# Altium PCB BLE-NTC.PcbDoc
Units mm, origin at the board's own origin, x right, y up, seen from the top; angles counter-clockwise.
Board outline 37.19 x 67.35 mm, 2 copper layers (Top Layer, Bottom Layer), stack 1.571 mm thick; 30 components, 20 nets, 147 pads, 37 vias.
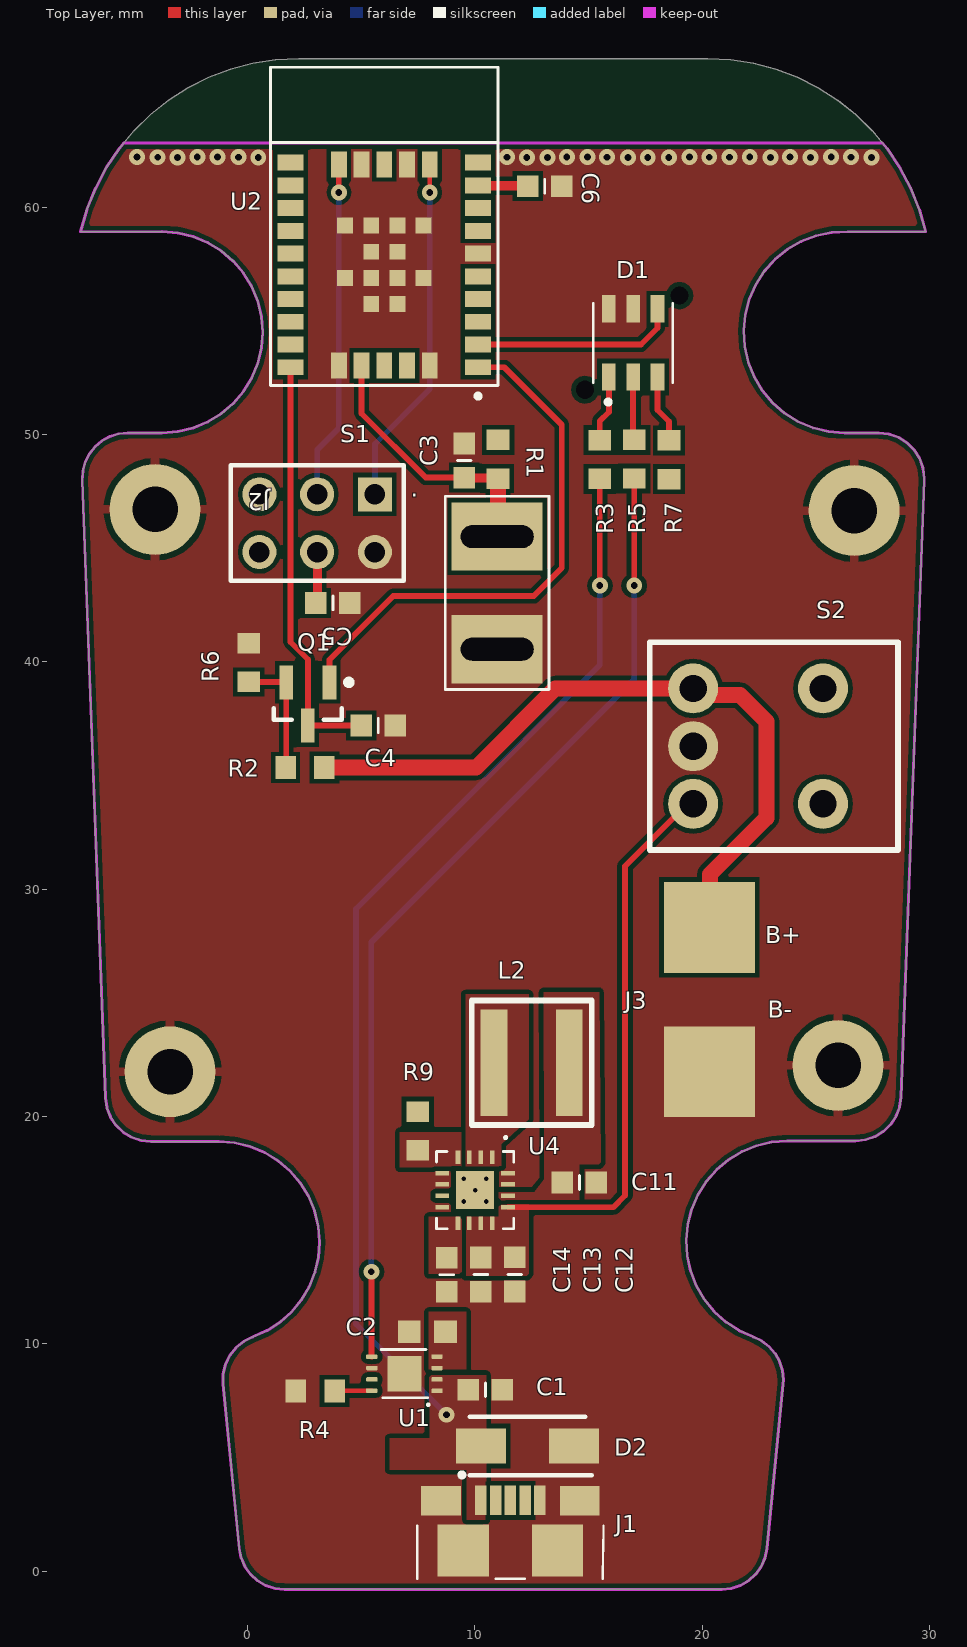
[diagram p0: Top Layer view]
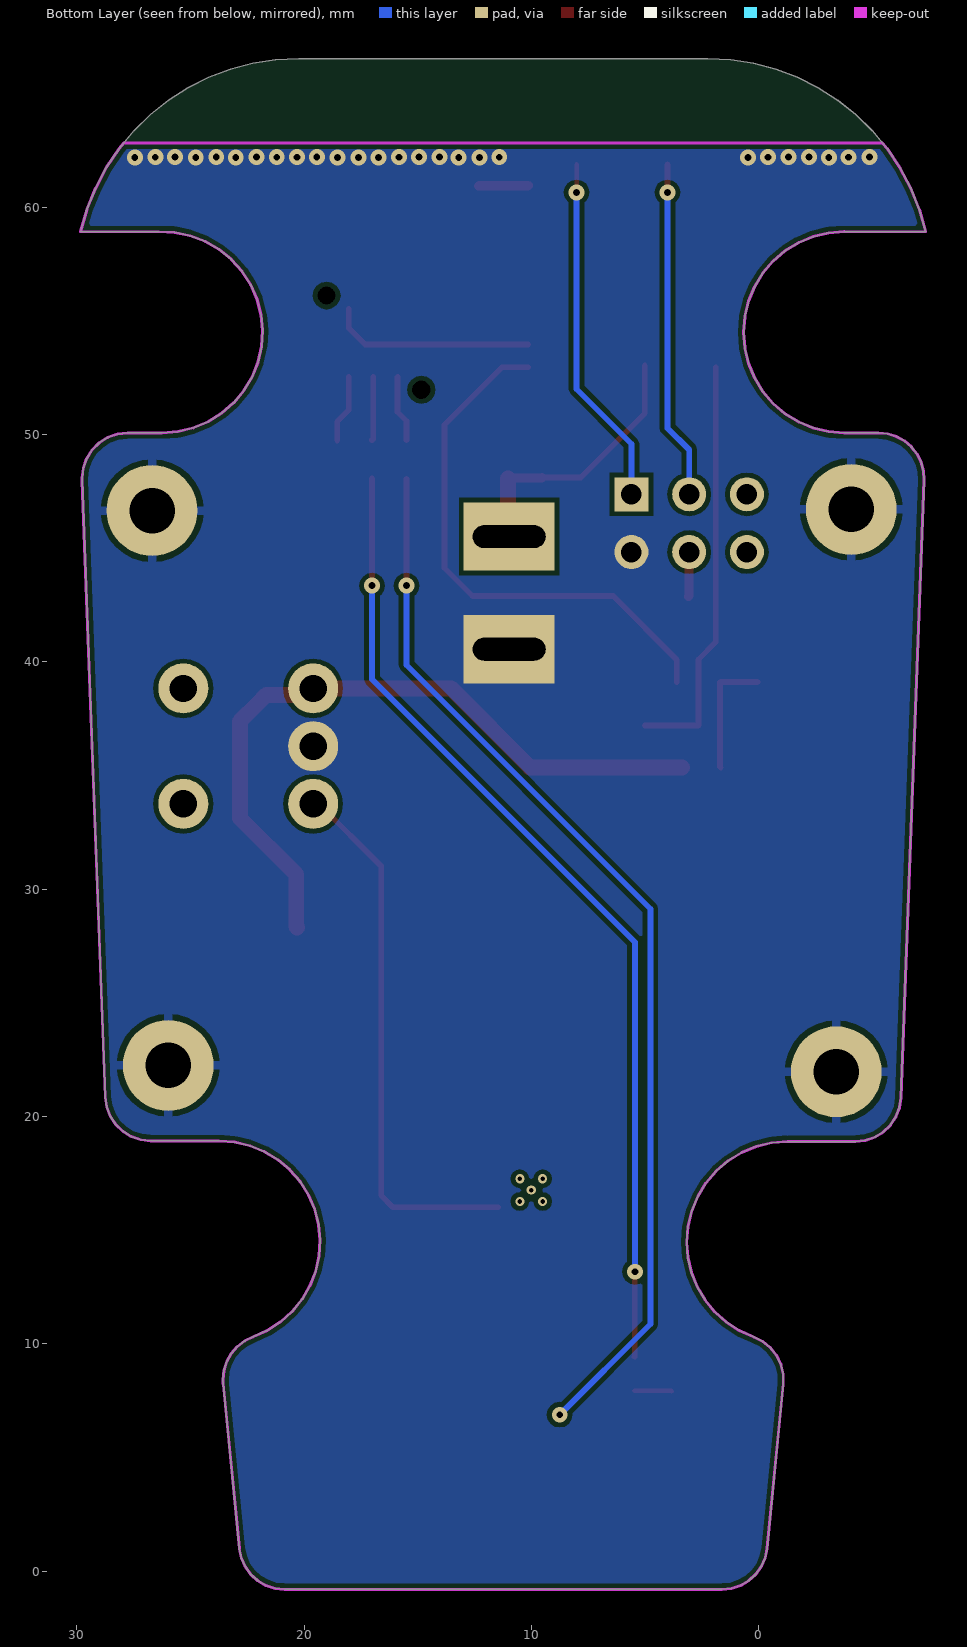
[diagram p1: Bottom Layer view, seen from below]
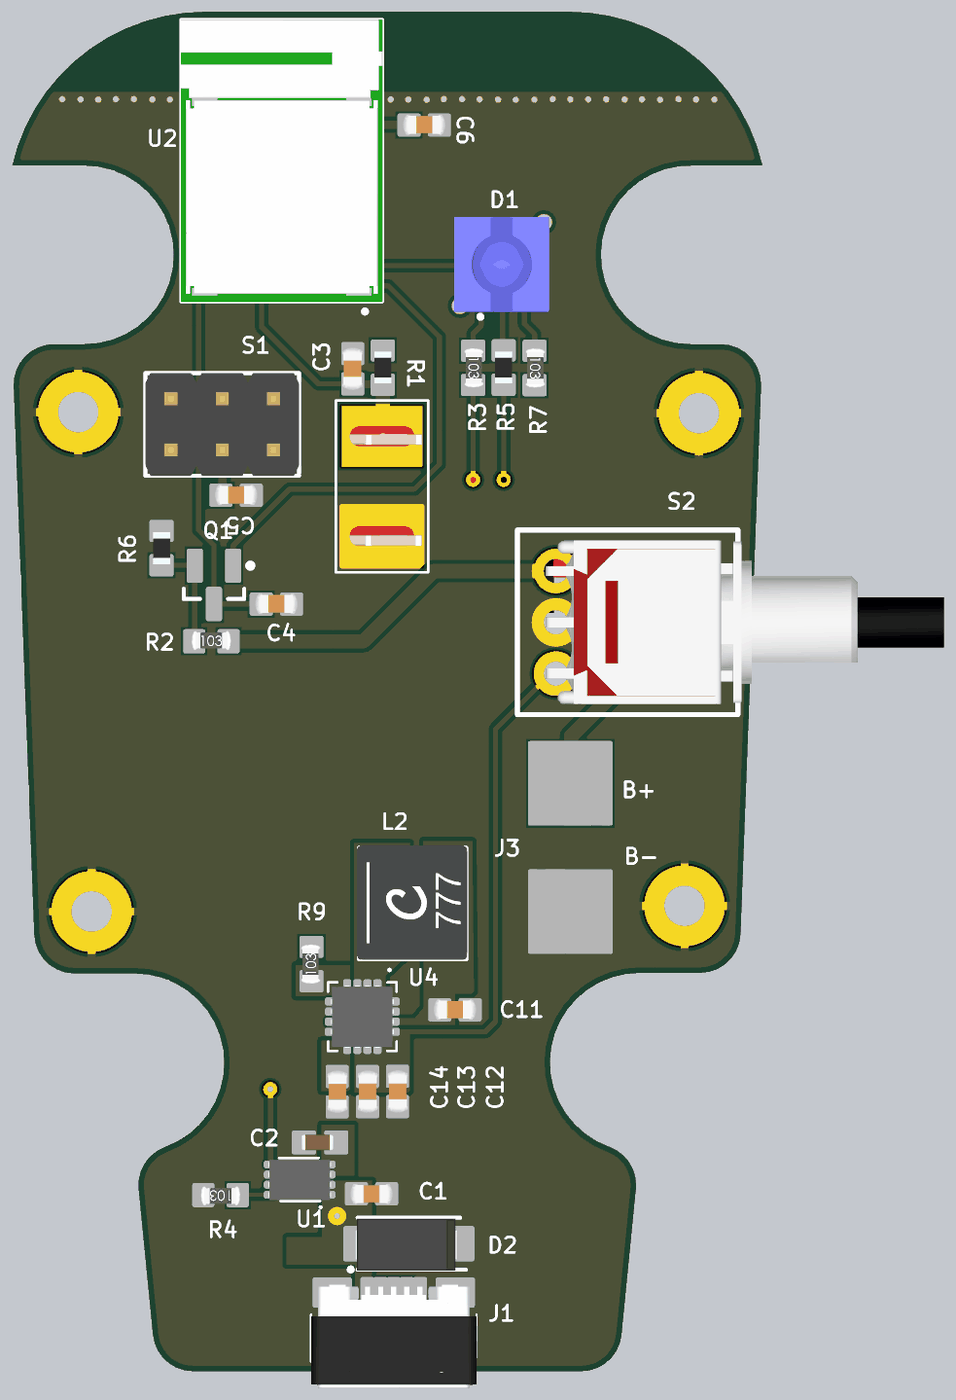
[diagram p2: 3D render of the assembled board from above, using the file's embedded part models]

## Layer stack, top to bottom
Top Solder: solder mask 0.0102, Solder Resist, Dk 3.5
Top Layer: signal copper 0.0356
Dielectric 1: dielectric 1.5, FR-4, Dk 4.8
Bottom Layer: signal copper 0.0356
Bottom Solder: solder mask 0.0102, Solder Resist, Dk 3.5

## Board outline
-3.753,50.079 -5.266,50.079 -5.665,50.039 -6.048,49.919 -6.4,49.726 -6.706,49.466 -6.954,49.151 -7.134,48.792 -7.239,48.405 -7.264,48.004 -6.247,20.827 -6.183,20.394 -6.026,19.986 -5.785,19.622 -5.47,19.318 -5.096,19.091 -4.683,18.95 -4.248,18.902 -1.252,18.902 -0.56,18.847 0.116,18.685 0.757,18.419 1.35,18.056 1.878,17.605 2.329,17.077 2.692,16.485 2.957,15.843 3.12,15.168 3.174,14.476 3.122,13.8 2.968,13.14 2.714,12.511 2.368,11.929 1.936,11.406 1.43,10.955 0.861,10.587 0.242,10.31 -0.154,10.116 -0.497,9.841 -0.773,9.497 -0.966,9.101 -1.068,8.672 -1.073,8.231 -0.362,0.999 -0.277,0.588 -0.108,0.203 0.137,-0.138 0.449,-0.42 0.812,-0.631 1.211,-0.761 1.629,-0.805 20.867,-0.805 21.285,-0.761 21.684,-0.631 22.048,-0.42 22.359,-0.138 22.604,0.203 22.773,0.588 22.858,0.999 23.569,8.23 23.579,8.426 23.537,8.832 23.414,9.222 23.214,9.578 22.946,9.886 22.621,10.133 22.252,10.309 21.623,10.591 21.045,10.967 20.532,11.428 20.097,11.963 19.75,12.559 19.499,13.201 19.351,13.874 19.308,14.563 19.373,15.249 19.543,15.917 19.815,16.551 20.182,17.135 20.634,17.655 21.162,18.099 21.752,18.456 22.39,18.718 23.061,18.877 23.748,18.93 26.759,18.93 27.193,18.978 27.607,19.119 27.98,19.347 28.295,19.65 28.537,20.015 28.693,20.423 28.757,20.856 29.775,48.004 29.776,48.079 29.726,48.524 29.578,48.946 29.34,49.326 29.023,49.642 28.644,49.881 28.221,50.028 27.776,50.079 26.263,50.079 25.563,50.134 24.881,50.3 24.234,50.571 23.638,50.941 23.107,51.401 22.656,51.939 22.296,52.541 22.036,53.193 21.881,53.877 21.837,54.578 21.905,55.276 22.081,55.956 22.363,56.598 22.743,57.188 23.212,57.711 23.757,58.153 24.365,58.503 25.021,58.753 25.708,58.896 26.409,58.928 29.845,58.928 29.564,59.905 29.184,60.848 28.708,61.747 28.142,62.592 27.493,63.374 26.766,64.085 25.97,64.717 25.112,65.264 24.203,65.72 23.252,66.079 22.269,66.339 21.265,66.496 20.249,66.548 2.254,66.548 1.238,66.496 0.234,66.339 -0.75,66.079 -1.701,65.72 -2.61,65.264 -3.467,64.717 -4.263,64.085 -4.99,63.374 -5.639,62.592 -6.205,61.747 -6.681,60.848 -7.061,59.905 -7.342,58.928 -3.906,58.928 -3.753,58.931 -3.061,58.876 -2.386,58.714 -1.744,58.448 -1.152,58.085 -0.624,57.634 -0.173,57.106 0.19,56.514 0.456,55.872 0.618,55.197 0.673,54.505 0.618,53.812 0.456,53.137 0.19,52.495 -0.173,51.903 -0.624,51.375 -1.152,50.924 -1.744,50.561 -2.386,50.295 -3.061,50.133

## Design rules (kind name [scope] priority, off if disabled: settings)
BoardOutlineClearance [All] p1: gap=0.1 ignorepadtopadclearanceinfootprint=FALSE except(0.25: Arc-OutlineEdge Arc-CutoutEdge)
Clearance [All] p1: gap=0.2 ignorepadtopadclearanceinfootprint=TRUE
HoleSize [All] p1: absolutevalues=TRUE maxlimit=5 minlimit=0.025 maxpercent=80.000 minpercent=20.000
MinimumAnnularRing [All] p1: minimumring=0.1
MinimumSolderMaskSliver [All] p1: minsoldermaskwidth=0.1
PasteMaskExpansion [All] p1: expansion=0.1
PlaneConnect [All] p1: planeconnectstyle=Direct reliefexpansion=0.508 reliefentries=4 reliefconductorwidth=0.254 reliefairgap=0.254
PolygonConnect [All] p1: connectstyle=Direct reliefconductorwidth=0.254 reliefentries=4 polygonreliefangle="90 Angle" airgapwidth=0.254
RoutingVias [All] p1: holewidth=0.3 width=0.7 viastyle="Through Hole" minholewidth=0.2 minwidth=0.4 maxholewidth=0.3 maxwidth=0.7
SilkToSolderMaskClearance [IsPad] p1: minsilkscreentomaskgap=0.2 clearancetoexposedcopper=TRUE
SolderMaskExpansion [All] p1: expansion=0.1 istentingtop=FALSE
Width [All] p1: maxlimit=1 minlimit=0.2 preferedwidth=0.254
25 further rules are at their usual default settings.

## Components (designator, comment, footprint, x,y, rotation, side; value= is the part's Value field where it differs from the comment)
C1 "Capacitor" CAPC1608N#1 10.469,7.987 r0 top
C2 "Capacitor" CAPC1608N#2 7.92,10.531 r180 top
C3 "Capacitor" CAPC1608N#1 9.541,48.86 r270 top
C4 "Capacitor" CAPC1608N#1 5.756,37.204 r180 top
C5 "Capacitor" CAPC1608N#1 3.759,42.596 r180 top
C6 "Capacitor" CAPC1608N#1 13.081,60.935 r180 top
C11 "Capacitor" CAPC1608N#1 14.605,17.1 r180 top
C12 "Capacitor" CAPC1608N#1 11.757,13.056 r90 top
C13 "Capacitor" CAPC1608N#1 10.272,13.049 r90 top
C14 "Capacitor" CAPC1608N#1 8.767,13.043 r90 top
D1 "Red & Green & Blue, 120deg" 150353M153300 15.892,52.535 r90 top
D2 "SMA6J5.0CA-TR" SMA6J5.0CA-TR 12.319,5.512 r180 top
J1 "GMCBA058211230HHR" GMCBA058211230HHR 11.569,0.808 r0 top
J2 "61300621121" HDR2X3 5.608,47.376 r180 top
J3 "BAT_PAD" BAT_PAD 18.293,24.13 r270 top
L2 "XAL5030-222MEB" 22uh-XAL5030 12.508,22.369 r0 top
Q1 "NX3008NBK" SOT23-3N 2.661,38.154 r270 top
R1 "Resistor" RESC1608N 11.03,48.919 r90 top
R2 "Resistor" RESC1608N 2.532,35.357 r0 top
R3 "Resistor" RESC1608N 15.503,48.905 r270 top
R4 "Resistor" RESC1608N 2.985,7.925 r180 top
R5 "Resistor" RESC1608N 17.018,48.92 r270 top
R6 "Resistor" RESC1608N 0.062,39.972 r90 top
R7 "Resistor" RESC1608N 18.551,48.897 r270 top
R9 "Resistor" RESC1608N 7.493,19.368 r90 top
S1 "T7335" T7335D 10.988,45.514 r270 top locked
S2 "800CSP1B6M6QE" 800CSP1B6M6QE 22.149,36.297 r270 top
U1 "MCP73831T-2ACI/MC" mcp-SON50P300X200X100-9N-D 4.227,11.158 r180 top
U2 "NINA-B112-00B-00" NINAB112 10.147,52.966 r270 top
U4 "TPS62132RGTR" tps62132 10.054,16.781 r270 top

## Footprints (in the part's own frame and the unit in brackets; to place one, negate y for a bottom-side part, rotate by r counter-clockwise, add the part's x,y. Pads: shape width x height; smd on the part's side, far side on the other; paste and mask are expansions set on the pad)
22uh-XAL5030 [mm]
  rect 1.18x4.7 smd: 1(-1.655,0) 2(1.655,0)
  silkscreen extent -2.64,-2.74 2.64,2.74, body extent -2.77,-2.8 2.71,2.88, height 3
800CSP1B6M6QE [mm]
  round 2.2 hole 1.2: 1(2.54,-2.54) 2(0,-2.54) 3(-2.54,-2.54) ""(-2.54,3.175) ""(2.54,3.175)
  silkscreen extent -4.57,-4.45 4.57,6.48, body extent -4.05,-3.04 4.05,16.69, height 6.35
150353M153300 [mm]
  rect 1.2x0.6 smd: 1(0,0) 2(3,0) 3(0,-1.075) 4(3,-1.075) 5(0,-2.15) 6(3,-2.15)
  round 0 hole 0.8: 8(-0.559,1.041) 8(3.581,-3.124)
  silkscreen extent -1.2,-2.82 3.26,0.67, body extent -0.85,-3.38 3.85,1.32, height 8.89
BAT_PAD [mm]
  rect 4x4 smd mask+0.05: BAT+(-4.191,2.032) BAT-(2.159,2.032)
CAPC1608N#1 [mm]
  rrect0% 0.95x0.95 smd: 1(-0.75,0) 2(0.75,0)
  silkscreen extent 0,-0.3 0,0.3, body extent -1.05,-0.53 1.05,0.5, height 0.81
CAPC1608N#2 [mm] "Chip Capacitor, Body 1.6x0.8mm, IPC Medium Density"
  rect 1x1 smd: 1(-0.8,0) 2(0.8,0)
  body extent -0.67,-0.4 0.93,0.4, height 0.9
GMCBA058211230HHR [mm]
  rect 0.5x1.3 smd: 1(-1.3,2.304) 2(-0.65,2.304) 3(0,2.304) 4(0.65,2.304) 5(1.3,2.304)
  rect 1.75x1.3 smd: 6(-3.048,2.286) 7(3.048,2.286)
  rect 2.25x2.3 smd: 8(-2.075,0.1) 9(2.075,0.1)
  silkscreen extent -4.1,-1.14 4.1,3.53, body extent -4.1,-2.43 4.1,2.67, height 3.77
HDR2X3 [mm] "Connector; Header; 3x2 Position"
  rect 1.5x1.5 hole 0.9: 1(0,0)
  round 1.5 hole 0.9: 2(0,2.54) 3(2.54,0) 4(2.54,2.54) 5(5.08,0) 6(5.08,2.54)
  silkscreen extent -1.27,-1.27 6.35,3.81, body extent -1.27,-1.27 6.35,3.81, height 8.67
mcp-SON50P300X200X100-9N-D [mm]
  rrect50% 0.5x0.2 smd: 1(-4.116,3.221) 2(-4.116,2.721) 3(-4.116,2.221) 4(-4.116,1.721) 5(-1.246,1.721) 6(-1.246,2.221) 7(-1.246,2.721) 8(-1.246,3.221)
  rect 1.5x1.55 smd: 9(-2.681,2.471)
  silkscreen extent -3.77,1.4 -1.66,3.89, body extent -4.23,1.47 -1.13,3.47, height 1
NINAB112 [mm]
  rect 0.7x1.15 smd: 1(0,0) 2(-1,0) 3(-2,0) 4(-3,0) 5(-4,0) 6(-5,0) 7(-6,0) 8(-7,0) 9(-8,0) 10(-9,0) 16(-9,-8.25) 17(-8,-8.25) 18(-7,-8.25) 19(-6,-8.25) 20(-5,-8.25) 21(-4,-8.25) 22(-3,-8.25) 23(-2,-8.25) 24(-1,-8.25) 25(0,-8.25)
  rect 1.15x0.7 smd: 11(-8.925,-2.125) 12(-8.925,-3.125) 13(-8.925,-4.125) 14(-8.925,-5.125) 15(-8.925,-6.125) 26(-0.075,-6.125) 27(-0.075,-5.125) 28(-0.075,-4.125) 29(-0.075,-3.125) 30(-0.075,-2.125)
  rect 0.7x0.7 smd: 31(-2.78,-3.55) 32(-3.93,-2.4) 33(-3.93,-3.55) 34(-3.93,-4.7) 35(-3.93,-5.85) 36(-5.08,-3.55) 37(-5.08,-4.7) 38(-6.23,-2.4) 39(-6.23,-3.55) 40(-6.23,-4.7) 41(-6.23,-5.85) 42(-2.78,-4.7)
  silkscreen extent -13.2,-9.13 1.32,0.87, body extent -13.2,-9.13 0.8,0.88, height 3.76
RESC1608N [mm] "Chip Resistor, Body 1.6x0.8mm, IPC Medium Density"
  rect 0.9x1 smd: 1(-0.85,0) 2(0.85,0)
  body extent -0.79,-0.42 0.79,0.43, height 0.5
SMA6J5.0CA-TR [mm]
  rect 2.2x1.55 smd: 1(-2.05,0) 2(2.05,0)
  silkscreen extent -2.82,-1.29 2.54,1.29, body extent -2.41,-1.24 2.66,1.34, height 2.23
SOT23-3N [mm] "SOT23, 3-Leads, Body 2.9x1.3mm, Pitch 0.95mm, Lead Span 2.5mm, IPC Medium Density"
  rect 1.5x0.6 smd: 1(-0.95,0.95) 2(-0.95,-0.95) 3(0.95,0)
  silkscreen extent -1.07,-1.5 0.7,1.93, body extent -0.7,-1.5 0.7,1.5, height 1.1
T7335D [mm]
  rect 3x4 hole 1 slot 3.2 at 90 deg: 1(0,0) 2(4.953,0)
  silkscreen extent -1.78,-2.29 6.73,2.29, body extent -3.25,-8.03 8.75,9.17, height 5.35
tps62132 [mm]
  rrect5% 0.6x0.2 smd: 1(-1.433,0.711) 2(-1.433,0.211) 3(-1.433,-0.289) 4(-1.433,-0.789) 9(1.467,-0.789) 10(1.467,-0.289) 11(1.467,0.211) 12(1.467,0.711)
  rrect5% 0.2x0.6 smd: 5(-0.733,-1.489) 6(-0.233,-1.489) 7(0.267,-1.489) 8(0.767,-1.489) 13(0.767,1.411) 14(0.267,1.411) 15(-0.233,1.411) 16(-0.733,1.411)
  rect 1.68x1.68 smd: 17(0.017,-0.039)
  silkscreen extent -2.34,-1.74 1.72,1.66, body extent -1.53,-1.59 1.57,1.51, height 1

## Part data
C1 C2: library part CAP-000000047, Value 1=4.7uF, Value 2=16V, DES="Multilayer Ceramic Capacitors MLCC - SMD/SMT 4.7UF 16V 10% 0603", FTP=0603, MAN="Murata Electronics", MANREF=GRM188C71C475KE21D, NOTE=_, Part Number=CAP-000000047, SUP=Mouser, SUPREF=81-GRM188C71C475KE1D, TOL=10%
C3 C4: library part CAP-000000003, Value 1=10nF, Value 2=50V, DES="06035C103JAT2A -  Condensateur cÃ©ramique multicouche CMS, 10000 pF, 50 V, 0603 [1608 Metric], Â± 5%, X7R", FTP=0603, MAN=MULTICOMP, MANREF=06035C103JAT2A, NOTE=_, Part Number=CAP-000000003, SUP=Farnell, SUPREF=1833871, TOL=5%
C5 C6 C13: library part CAP-000000005, Value 1=100nF, Value 2=10V, DES="C0603X104K8RACTU -  Condensateur cÃ©ramique multicouche CMS, 0.1 ÂµF, 10 V, 0603 [1608 Metric], Â± 10%, X7R", FTP=0603, MAN=KEMET, MANREF=C0603X104K8RACTU, NOTE=_, Part Number=CAP-000000005, SUP=Farnell, SUPREF=2904937, TOL=10%
C11: library part CAP-000000045, Value 1=22uF, Value 2=6V3, DES="Multilayer Ceramic Capacitors MLCC - SMD/SMT 0603 22uF 6.3volts *Derate Voltage/Temp", FTP=0603, MAN="Murata Electronics", MANREF=GRM188R60J226MEA0D, NOTE="In Stock", Part Number=CAP-000000045, SUP=Mouser, SUPREF=81-GRM188R60J226ME0D, TOL=20%
C12: library part CAP-000000006, Value 1=10uF, Value 2=35V, DES="Multilayer Ceramic Capacitors MLCC - SMD/SMT 0603 10uF 35volts *Derate Voltage/Temp", FTP=0603, MAN="Murata Electronics", MANREF=GRM188R6YA106MA73D, NOTE=_, Part Number=CAP-000000006, SUP=Mouser, SUPREF=81-GRM188R6YA106MA3D, TOL=20%
C14: library part CAP-000000044, Value 1=430pF, Value 2=50V, DES="Multilayer Ceramic Capacitors MLCC - SMD/SMT 50V 430pF 0603 C0G 0.02", FTP=0603, MAN=KEMET, MANREF=C0603C431G5GACTU, NOTE="In Stock", Part Number=CAP-000000044, SUP=Mouser, SUPREF=80-C0603C431G5G, TOL=2%
D1: library part LED-000000004, Value 1="100 mA", Value 2=_, DES="WL-SFTW SMD Full-color TOP LED Waterclear, size 5050, Red & Green & Blue, 120deg", FTP=_, MAN="Wurth Elektronik", MANREF=150353M153300, NOTE="In Stock", Part Number=LED-000000004, SUP=Mouser, SUPREF=710-150353M153300, TOL=_
D2: library part TVS-000000006, Value 1="13.4 V", Value 2=600W, DES="ESD Suppressors / TVS Diodes HJ Temp Transil / ESD Suppressors / TVS Diodes HJ Temp Transil", FTP=SMA, MAN=STMicroelectronics, MANREF=SMA6J5.0CA-TR, NOTE="In Stock", Part Number=TVS-000000006, SUP=Mouser, SUPREF=511-SMA6J5.0CA-TR, TOL=_
J1: library part CON-000000037, Value 1=_, DES="USB Connectors USB MICRO B TYPE RECPT", FTP=SMD, MAN="Amphenol Commercial Products", MANREF=GMCBA058211230HHR, NOTE="In Stock", Part Number=CON-000000037, SUP=Mouser, SUPREF=523-GMCBA05821123HHR, TOL=_, Value 2=_
J2: library part CON-000000012, Value 1=6pts, Value 2=_, DES="Embases et logements de cÃ¢bles WR-PHD 2.54mm Hdr 6P Dual Str Gold", FTP=THT, MAN="Wurth Electronics", MANREF=61300621121, NOTE="In Stock", Part Number=CON-000000012, SUP=Mouser, SUPREF=710-61300621121, TOL=_
J3: library part MIS-000000024, Value 1=_, DES=_, FTP=_, MAN=_, MANREF=_, NOTE=_, Part Number=MIS-000000024, SUP=_, SUPREF=_, TOL=_
L2: library part IND-000000001, Value 1=2.2uH, Value 2="9.2 A", DES="Fixed Inductors 2.2uH 20% 9.7A 14.5mOhms AEC-Q200", FTP=_, MAN=Coilcraft, MANREF=XAL5030-222MEB, NOTE="In Stock", Part Number=IND-000000001, SUP=Mouser, SUPREF=994-XAL5030-222MEB, TOL="20 %"
Q1: library part TRM-000000001, Value 1=400mA, Value 2=30V, DES="NXP  NX3008NBK  MOSFET, N CH, 30V, 400MA, SOT23", FTP=SOT-23, MAN=NXP, MANREF=NX3008NBK, NOTE="In Stock", Part Number=TRM-000000001, SUP=Farnell, SUPREF=2069541, TOL=_
R1: library part RES-000000001, Value 1=10K, Value 2=0.1W, DES="YAGEO (PHYCOMP)  RC0603FR-0710KL  RESISTANCE COUCHE EPAISSE 10K 0.1W 1%", FTP=0603, MAN=YAGEO, MANREF=RC0603FR-0710KL, NOTE=_, Part Number=RES-000000001, SUP=Farnell, SUPREF=9238603, TOL=1%
R2: library part RES-00000011s3, Value 1=806K, Value 2=0.1W, DES="Thick Film Resistors 806KOHM 1/10WATT 1%", FTP=0603, MAN=Bourns, MANREF=CR0603-FX-8063ELF, NOTE="In Stock", Part Number=RES-00000011s3, SUP=Mouser, SUPREF=652-CR0603-FX8063ELF, TOL=1%
R3: library part RES-000000098, Value 1=160R, Value 2=0,1W, DES="Thick Film Resistors 1/10watt 160ohms 1%", FTP=0603, MAN="Vishay / Dale", MANREF=CRCW0603160RFKEA, NOTE="In Stock", Part Number=RES-000000098, SUP=Mouser, SUPREF=71-CRCW0603-160-E3, TOL=1%
R4: library part RES-000000009, Value 1=2K2, Value 2=0.1W, DES="YAGEO (PHYCOMP)  RC0603FR-072K2L  RESISTANCE COUCHE EPAISSE 2.2K 0.1W 1%", FTP=0603, MAN=YAGEO, MANREF=RC0603FR-072K2L, NOTE=_, Part Number=RES-000000009, SUP=Farnell, SUPREF=9238522, TOL=1%
R5 R7: library part RES-000000097, Value 1=5R1, Value 2=10W, DES="Thick Film Resistors 1/10watt 5.1ohms 5%", FTP=0603, MAN="Vishay / Dale", MANREF=CRCW06035R10JNEA, NOTE="In Stock", Part Number=RES-000000097, SUP=Mouser, SUPREF=71-CRCW0603J-5.1-E3, TOL=5%
R6: library part RES-00000011d2, Value 1="2 M", Value 2=0.125W, DES="Thin Film Resistors .1W 2Mohms 1% 0603 50ppm", FTP=0603, MAN="Vishay / Beyschlag", MANREF=MCT06030C2004FP500, NOTE="In Stock", Part Number=RES-00000011d2, SUP=Mouser, SUPREF=594-MCT06030C2004FP5, TOL=1%
R9: library part RES-000000038, Value 1=100K, Value 2=0.1W, DES="YAGEO (PHYCOMP)  RC0603FR-07100KL  RESISTANCE COUCHE EPAISSE 100K 0.1W 1%", FTP=0603, MAN=YAGEO, MANREF=RC0603FR-07100KL, NOTE=_, Part Number=RES-000000038, SUP=Farnell, SUPREF=9238727, TOL=1%
S1: library part MIS-000000023, Value 1=_, DES="Negative temperature coefficient thermistor", FTP=_, MAN=Honeywell, MANREF="T7335 D1008", NOTE=_, Part Number=MIS-000000023, SUP=_, SUPREF=_, TOL=_, Value 2=_
S2: library part SWC-000000006, Value 1=_, DES="Pushbutton Switches SPDT ON-ON PC MNT", FTP=_, MAN=E-Switch, MANREF=800CSP1B6M6QE, NOTE=_, Part Number=SWC-000000006, SUP=E-Switch, SUPREF=800CSP1B6M6QE, TOL=_, Value 2=_
U1: library part ICP-000000011, Value 1=_, DES="Battery Management Charge mgnt contr /  / Battery Management Charge mgnt contr", FTP=DFN, MAN="Microchip Technology", MANREF=MCP73831T-2ACI/MC, NOTE="In Stock", Part Number=ICP-000000011, SUP=Mouser, SUPREF=579-MCP73831T-2ACIMC, TOL=_, Value 2=_
U2: library part RFC-000000004, Value 1=_, DES="MOD BLE 5.0 NORDIC NRF52832 SOC", FTP=_, MAN=U-Blox, MANREF=NINA-B112-00B-00, NOTE="In Stock", Part Number=RFC-000000004, SUP=Digi-Key, SUPREF=672-NINA-B112-00B-00CT-ND, TOL=_, Value 2=_
U4: library part ICP-000000010, Value 1=_, DES="Switching Voltage Regulators 3-17V 3A SD Cnvrtr", FTP=VQFN-16, MAN="Texas Instruments", MANREF=TPS62132RGTR, NOTE="In Stock", Part Number=ICP-000000010, SUP=Mouser, SUPREF=595-TPS62132RGTR, TOL=_, Value 2=_

## Free pads (board coordinates)
  round 4 hole 2: MH(-4.064,46.711) MH(-3.404,21.971) MH(25.984,22.25) MH(26.695,46.66)

## Via types
v1: diameter 0.7, hole 0.3, Top Layer to Bottom Layer, tented both sides, 28 vias
v2: diameter 0.7, hole 0.3, Top Layer to Bottom Layer, 4 vias
v3: diameter 0.4, hole 0.2, Top Layer to Bottom Layer, tented both sides, 4 vias
v4: diameter 0.4, hole 0.2, Top Layer to Bottom Layer, 1 vias

## Nets (pads, with @x,y where several pads share a name; then routed paths per layer and width w, separated by ;. In a path a pad name is that pad's centre, name@x,y a point inside that pad or via, vN(x,y) a via of type N, cw(c..) or ccw(c..) an arc to the next point about the centre after c; other vN are vias at no path point)
3V3: C5.2 C6.2 C11.2 J2.4 L2.2 R1.2 R7.2 R9.2 U2.9 U2.10 U4.7 U4.14 | length 4.2
  Top Layer w0.4: J2.4 3.084,44.821 3.084,42.901 C5.2@3.099,42.886 ; U2.9 10.163,60.95 12.315,60.95 C6.2
5V: C1.1 D2.2 J1.1 R3.2 U1.1 U1.2 | length 47.3
  Top Layer w0.254: v2(15.503,43.358) R3.2
  Bottom Layer w0.254: v2(8.763,6.882) 4.775,10.871 4.775,29.138 15.503,39.866 v2(15.503,43.358)
ADC_NTC: C3.2 R1.1 S1.1 U2.27 | length 11.9
  Top Layer w0.254: U2.27 5.022,50.93 7.842,48.11 C3.2 ; S1.1 S1.1@11.03,45.555
  Top Layer w0.4: C3.2 9.561,48.089 11.009,48.089 R1.1
  Top Layer w0.7: S1.1@11.03,45.555 R1.1
ADC_VBAT: C4.2 Q1.3 U2.25 | length 18.4
  Top Layer w0.254: U2.25 1.897,40.874 2.661,40.111 Q1.3 C4.2
GND: C1.2 C2.2 C3.1 C4.1 C5.1 C6.1 C11.1 C12.1 C13.1 C14.1 D1.2 D1.4 D2.1 J1.5 J1.6 J1.7 J1.8 J1.9 J2.2 J3.BAT- pad.MH R4.2 R6.2 S1.2 S2.2 U1.6 U1.9 U2.6 U2.12 U2.14 U2.26 U2.30 U2.31 U2.32 U2.33 U2.34 U2.35 U2.36 U2.37 U2.38 U2.39 U2.40 U2.41 U2.42 U4.5 U4.6 U4.8 U4.15 U4.16
  other v1: 13.207,62.188 17.612,62.187 24.774,62.187 -4.862,62.213 -3.947,62.204 -3.076,62.194 -2.204,62.213 -1.308,62.216 -0.394,62.206 0.477,62.196 11.421,62.208 12.292,62.198 14.053,62.216 14.956,62.217 15.827,62.207 16.742,62.197 18.54,62.194 19.449,62.216 20.32,62.206 21.212,62.208 22.1,62.209 23.015,62.2 23.873,62.209 26.554,62.208 27.456,62.199 25.683,62.217
LED_B: D1.6 U2.2 | length 9
  Top Layer w0.254: U2.2 17.315,53.966 18.042,54.693 D1.6
MOS: Q1.1 U2.1 | length 23.9
  Top Layer w0.254: Q1.1 3.611,40.099 6.412,42.901 12.597,42.901 13.831,44.135 13.831,50.432 11.297,52.966 U2.1
NetC14_2: C14.2 U4.9
NetD1_1: D1.1 R3.1 | length 2.9
  Top Layer w0.254: R3.1 15.503,50.6 15.903,51 15.903,52.524 D1.1
NetD1_3: D1.3 R5.1 | length 2.8
  Top Layer w0.254: D1.3 16.967,49.821 R5.1
NetD1_5: D1.5 R7.1 | length 3
  Top Layer w0.254: D1.5 18.042,51.086 18.551,50.576 R7.1
NetL2_1: L2.1 U4.1 U4.2 U4.3
NetQ1_2: Q1.2 R2.1 R6.1 | length 5.4
  Top Layer w0.254: R6.1 1.693,39.122 Q1.2 1.711,35.385 R2.1
NetR4_1: R4.1 U1.8 | length 1.6
  Top Layer w0.2: R4.1 3.847,7.937 U1.8
NetR9_1: R9.1 U4.4
STAT: R5.2 U1.5 | length 43.4
  Top Layer w0.254: v2(5.452,13.172) 5.463,13.161 5.463,9.448 U1.5 ; v2(17.018,43.358) R5.2
  Bottom Layer w0.254: v2(5.452,13.172) 5.452,27.673 17.018,39.239 v2(17.018,43.358)
SWDCLK: J2.1 U2.11 | length 15.5
  Top Layer w0.2: v1(8.022,60.655) 8.022,60.822 U2.11
  Bottom Layer w0.254: J2.1 5.608,49.593 8.022,52.006 v1(8.022,60.655)
SWDIO: J2.3 U2.15 | length 14.9
  Top Layer w0.254: v1(4.022,60.655) U2.15
  Bottom Layer w0.254: J2.3 3.068,49.333 4.022,50.287 v1(4.022,60.655)
VBAT+: C2.1 J3.BAT+ R2.2 S2.3 U1.3 U1.4 | length 31.6
  Top Layer w0.7: R2.2 10.062,35.357 13.542,38.837 S2.3 19.896,38.55 21.667,38.55 22.035,38.182 22.834,37.383 22.834,33.137 20.353,30.657 20.353,28.35 J3.BAT+
VBAT_TSP: C12.2 C13.2 S2.1 U4.10 U4.11 U4.12 U4.13 | length 24
  Top Layer w0.254: U4.13 16.104,16.014 16.612,16.522 16.612,31.013 19.355,33.757 S2.1
pads on no net: D1.8 J1.2 J1.3 J1.4 J2.5 J2.6 S2. U1.7 U2.3 U2.4 U2.5 U2.7 U2.8 U2.13 U2.16 U2.17 U2.18 U2.19 U2.20 U2.21 U2.22 U2.23 U2.24 U2.28 U2.29 U4.17
copper on no net:
  other v3: 9.515,16.264 10.515,16.264 9.515,17.264 10.515,17.264
  other v4: 10.015,16.764

## Polygon pours and split planes (outlines as drawn)
GND on Top Layer "Top Layer-GND" (solid, remove dead copper, pour order 29): 344 vertices, not listed, extent -7.259,-0.742 29.761,62.768
5V on Top Layer "5V_L01_P024" (solid, remove dead copper, pour order 24): 8.003,8.629 8.015,5.845 6.259,5.845 6.259,4.47 9.652,4.47 9.652,2.134 10.498,2.134 10.498,4.615 10.498,8.629
3V3 on Top Layer "3V3_L01_P009" (solid, remove dead copper, pour order 9): 11.049,16.679 11.049,16.298 13.157,16.298 13.416,16.298 14.605,16.298 14.605,17.902 15.549,17.902 15.47,25.467 13.259,25.467 13.031,25.466 13.031,25.372 13.056,18.607 13.056,17.239 12.609,16.679
VBAT+ on Top Layer "VBAT+_L01_P025" (solid, remove dead copper, pour order 25): 7.983,8.886 9.624,8.886 9.624,8.937 9.624,8.965 9.624,11.406 7.983,11.406
NetR9_1 on Top Layer "NETR9_1_L01_P021" (solid, remove dead copper, pour order 21): 9.449,19.318 6.706,19.318 6.706,17.77 9.449,17.77
NetC14_2 on Top Layer "NETC14_2_L01_P019" (solid, remove dead copper, pour order 19): 9.44,15.583 7.983,15.583 7.983,13.085 9.457,13.085
VBAT_TSP on Top Layer "VBAT_TSP_L01_P018" (solid, remove dead copper, pour order 18): 9.624,15.583 11.049,15.583 11.049,16.298 12.367,16.298 12.37,12.995 9.624,12.995 9.624,14.364
NetL2_1 on Top Layer "NETL2_1_L01_P000" (solid, remove dead copper, pour order 0): 9.606,25.371 12.37,25.371 12.37,19.881 11.171,18.781 11.171,17.769 11.195,17.746 9.606,17.746
GND on Bottom Layer "GND_L02_P027" (solid, remove dead copper, pour order 27): 344 vertices, not listed, extent -7.259,-0.742 29.761,62.768

## Keep-outs
Keep-Out Layer:
  lines w0.125: -5.441,62.83 -5.207,62.83 27.944,62.83 28.142,62.592 28.708,61.747 29.183,60.848 29.564,59.905 29.845,58.928 26.409,58.928 25.708,58.896 25.021,58.753 24.365,58.503 23.757,58.153 23.212,57.711 22.743,57.188 22.363,56.598 22.081,55.955 21.905,55.276 21.837,54.578 21.881,53.877 22.036,53.193 22.296,52.541 22.656,51.939 23.107,51.401 23.638,50.941 24.234,50.571 24.881,50.3 25.563,50.134 26.263,50.079 27.776,50.079 28.221,50.028 28.644,49.881 29.023,49.642 29.34,49.326 29.578,48.946 29.726,48.524 29.776,48.079 29.775,48.004 28.757,20.856 28.693,20.423 28.537,20.015 28.295,19.65 27.98,19.347 27.607,19.119 27.193,18.978 26.759,18.93 23.748,18.93 23.061,18.877 22.39,18.718 21.752,18.456 21.162,18.099 20.634,17.655 20.182,17.135 19.815,16.551 19.543,15.917 19.373,15.249 19.308,14.563 19.351,13.874 19.499,13.201 19.75,12.559 20.097,11.963 20.532,11.428 21.045,10.967 21.623,10.591 22.252,10.309 22.621,10.133 22.946,9.886 23.214,9.578 23.414,9.222 23.537,8.832 23.579,8.426 23.569,8.23 22.858,0.999 22.773,0.588 22.604,0.203 22.359,-0.138 22.048,-0.42 21.684,-0.631 21.285,-0.761 20.867,-0.805 1.629,-0.805 1.211,-0.761 0.812,-0.631 0.449,-0.42 0.137,-0.138 -0.108,0.203 -0.277,0.588 -0.362,0.999 -1.073,8.231 -1.068,8.672 -0.966,9.101 -0.773,9.497 -0.497,9.841 -0.154,10.116 0.242,10.31 0.861,10.587 1.43,10.955 1.936,11.406 2.368,11.929 2.714,12.511 2.968,13.14 3.122,13.8 3.174,14.476 3.12,15.168 2.957,15.843 2.692,16.485 2.329,17.077 1.878,17.605 1.35,18.056 0.757,18.419 0.116,18.685 -0.56,18.847 -1.252,18.902 -4.248,18.902 -4.683,18.95 -5.096,19.091 -5.47,19.318 -5.785,19.622 -6.026,19.986 -6.183,20.394 -6.247,20.827 -7.264,48.004 -7.239,48.405 -7.134,48.792 -6.954,49.151 -6.706,49.466 -6.4,49.726 -6.048,49.919 -5.665,50.039 -5.266,50.079 -3.753,50.079 -3.061,50.133 -2.386,50.295 -1.744,50.561 -1.152,50.924 -0.624,51.375 -0.173,51.903 0.19,52.495 0.456,53.137 0.618,53.812 0.673,54.505 0.618,55.197 0.456,55.872 0.19,56.514 -0.173,57.106 -0.624,57.634 -1.152,58.085 -1.744,58.448 -2.386,58.714 -3.061,58.876 -3.753,58.931 -3.906,58.928 -7.342,58.928 -7.061,59.905 -6.681,60.848 -6.205,61.747 -5.64,62.592 -5.451,62.819 -5.324,62.83

## Text inside footprints (layer, text, board x,y; h text height)
J3: Top Overlay "B+" at 22.784,27.635 h0.76; Top Overlay "B-" at 22.903,24.343 h0.76